# EAGLE board ATtiny84 (EAGLE 8.6.1)
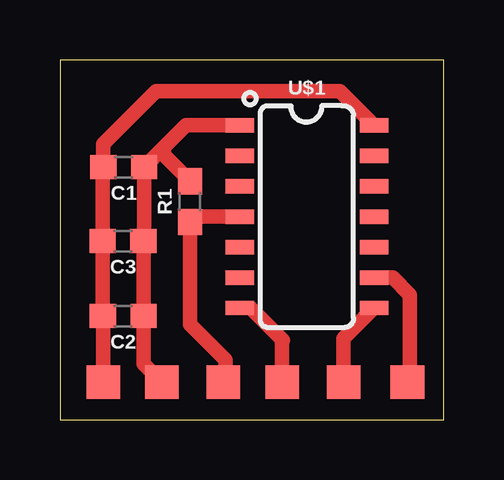
[diagram p0: board, top side]

Size 16 x 15 mm. Coordinates in mm from the lower left corner, seen from the top.
Outline: 0,0 16,0 16,15 0,15 0,0
Copper layers (1*16): Top 0.035mm / dielectric 1.5mm / Bottom 0.035mm
Design rules "OthermillDRC_1_64_v2": minimum track width 16mil, minimum drill 31mil, track to track 0.39878125mm, track to pad 0.39878125mm, pad to pad 0.39878125mm, via to via 0.39878125mm, smd to smd 0mil, copper to edge 0mil, drill to drill 1mil, minimum pad ring 0mil, minimum via ring 15mil, stop-mask expansion 1mil, vias tented up to drill 30mil, thermal gap 10mil

## Footprints (pad centres in the part's own frame; a part is rotated, then mirrored left to right if it is on the bottom)
0603 = smd 1.1 x 1: 1 -0.85,0; 2 0.85,0
TP14SQ = smd 1.4 x 1.4: TP 0,0
SO14 = smd 0.6 x 1.2: 1 -3.175,-2.8; 2 -1.905,-2.8; 3 -0.635,-2.8; 4 0.635,-2.8; 5 1.905,-2.8; 6 3.175,-2.8; 7 4.445,-2.8; 8 4.445,2.8; 9 3.175,2.8; 10 1.905,2.8; 11 0.635,2.8; 12 -0.635,2.8; 13 -1.905,2.8; 14 -3.175,2.8

## Placement (x,y rotation side)
C1  0.1uF  [0603]  2.66,10.53 180 top
C2  4.7uF  [0603]  2.64,4.32 180 top
C3  4.7uF  [0603]  2.63,7.45 180 top
GND  TPSTP14SQ  [TP14SQ]  1.81,1.57 0 top
MISO  TPSTP14SQ  [TP14SQ]  11.83,1.57 0 top
MOSI  TPSTP14SQ  [TP14SQ]  9.27,1.57 0 top
R1  10k  [0603]  5.43,9.09 90 top
RESET  TPSTP14SQ  [TP14SQ]  6.81,1.57 0 top
SCK  TPSTP14SQ  [TP14SQ]  14.49,1.57 0 top
U$1  ATTINY84  [SO14]  10.3,9.1 270 top
VCC  TPSTP14SQ  [TP14SQ]  4.25,1.57 0 top

## Library data of the parts
C1 = SparkFun-Capacitors; PROD_ID: CAP-08604
C2 C3 = SparkFun-Capacitors; PROD_ID: CAP-08280
GND MISO MOSI RESET SCK VCC = testpad
R1 = SparkFun-Resistors; PROD_ID: RES-00824
U$1 = SparkFun-IC-Microcontroller; PROD_ID: IC-11285

## Nets
GND: C1.2 C2.2 C3.2 GND.TP U$1.14
MISO: MISO.TP U$1.8
MOSI: MOSI.TP U$1.7
RESET: R1.1 RESET.TP U$1.4
SCK: SCK.TP U$1.9
VCC: C1.1 C2.1 C3.1 R1.2 U$1.1 VCC.TP

## Tracks (layer width: path | path; a pad name or v marks a point on that pad's centre or on a via)
GND
  Top 0.61: GND.TP 1.81,4.3 C2.2 C3.2 1.78,10.5 C1.2 1.81,11.49 1.8,11.5 4,13.7 11.68,13.7 U$1.14
MISO
  Top 0.61: U$1.8 11.83,3.38 MISO.TP
MOSI
  Top 0.61: U$1.7 7.95,4.66 9.3,3.3 9.27,3.27 MOSI.TP
RESET
  Top 0.61: RESET.TP 6.9,1.66 6.9,2.5 5.43,3.97 R1.1 5.66,8.46 U$1.4
SCK
  Top 0.61: U$1.9 13.88,5.92 14.6,5.2 14.6,1.68 SCK.TP
VCC
  Top 0.61: U$1.1 5.25,12.28 4.34,11.36 | 4.34,11.36 C1.1 3.51,7.48 C3.1 C2.1 3.49,2.33 VCC.TP | R1.2 4.34,11.03 4.34,11.36